# Altium PCB MX1508.PcbDoc
Units mil, origin at the board's own origin, x right, y up, seen from the top; angles counter-clockwise.
Board outline 1180 x 770 mil, 2 copper layers (Top Layer, Bottom Layer); 23 components, 20 nets, 84 pads, 21 vias.
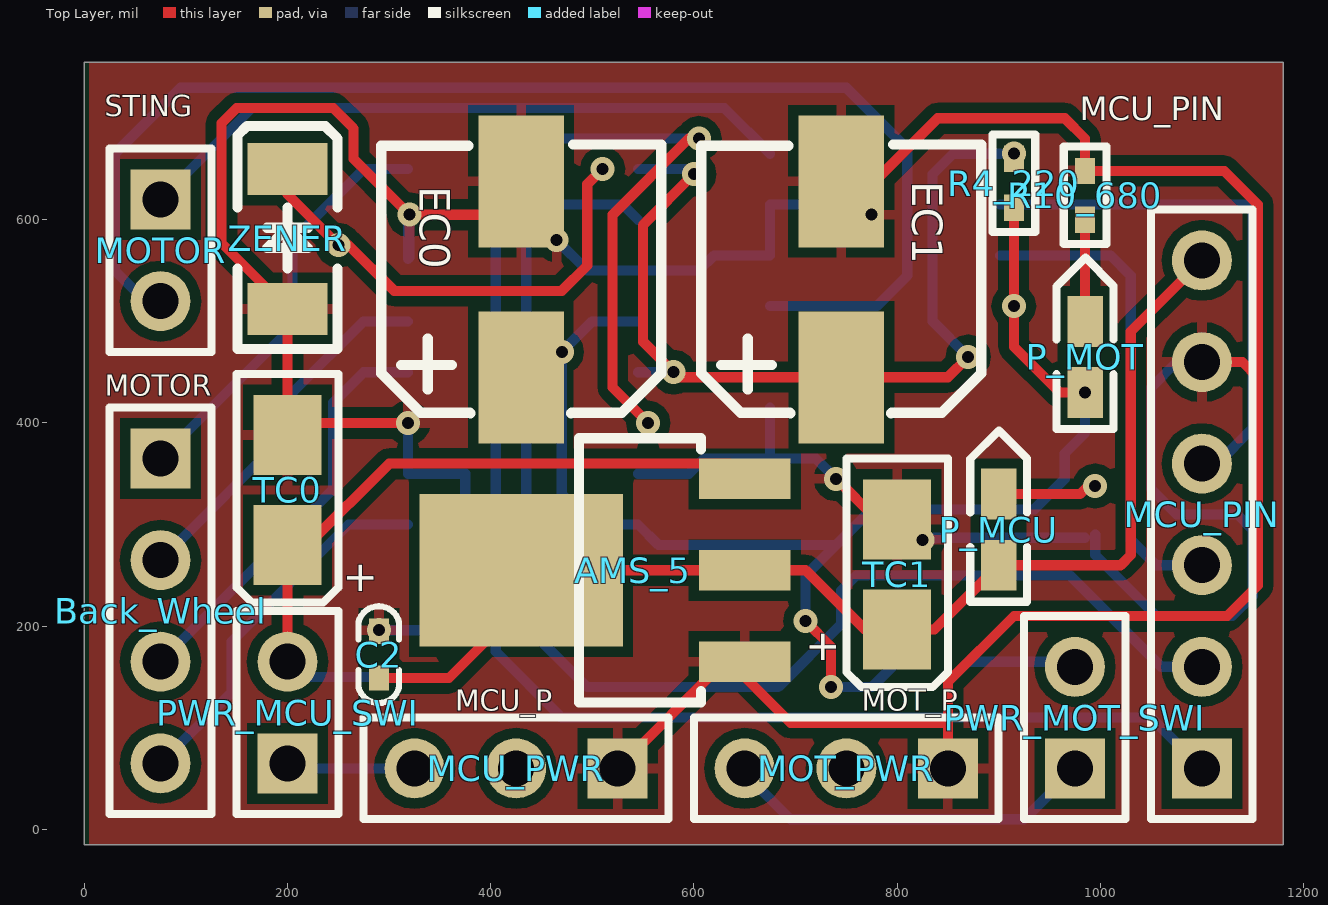
[diagram p0: Top Layer view]
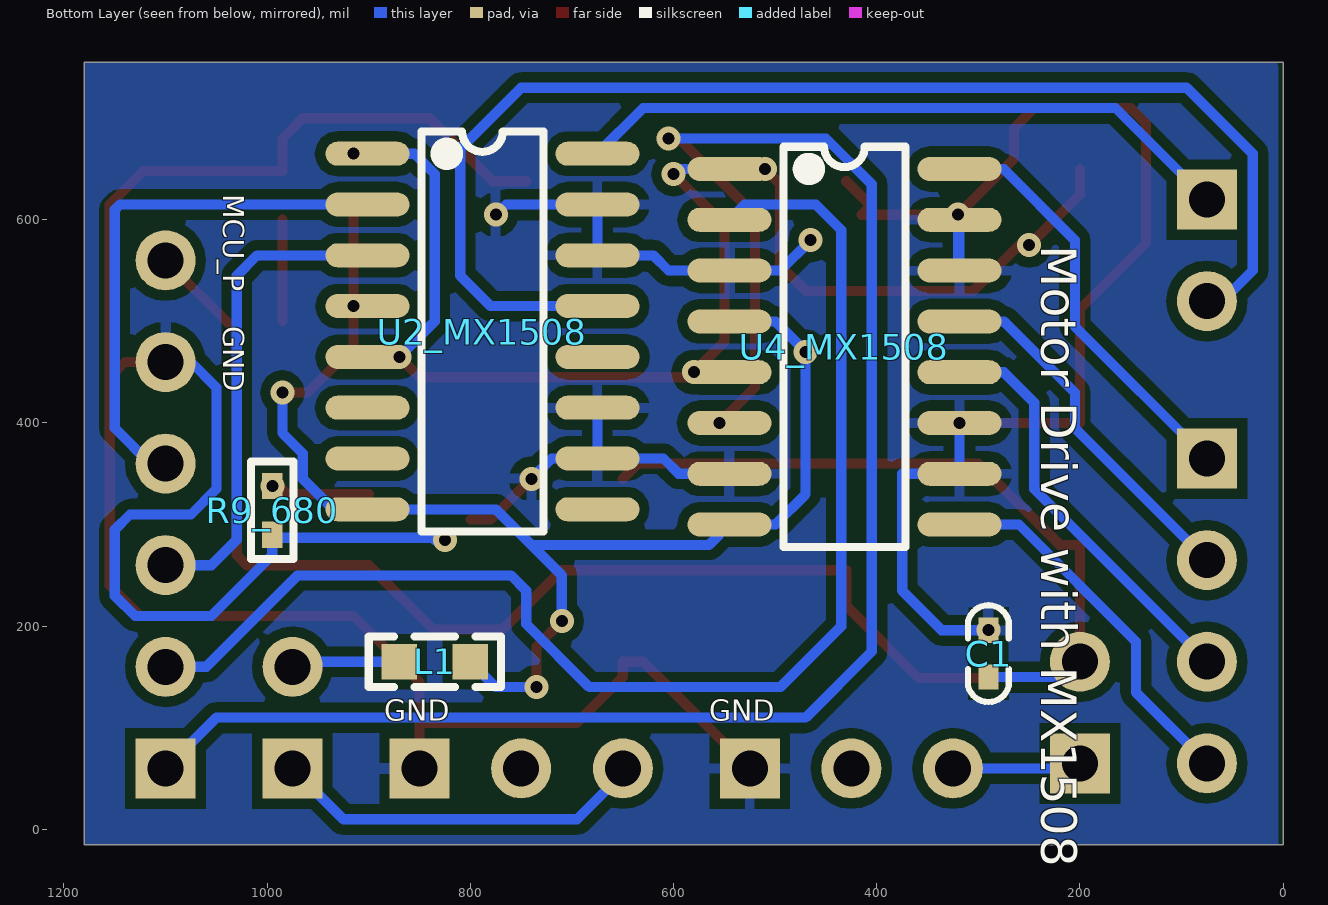
[diagram p1: Bottom Layer view, seen from below]
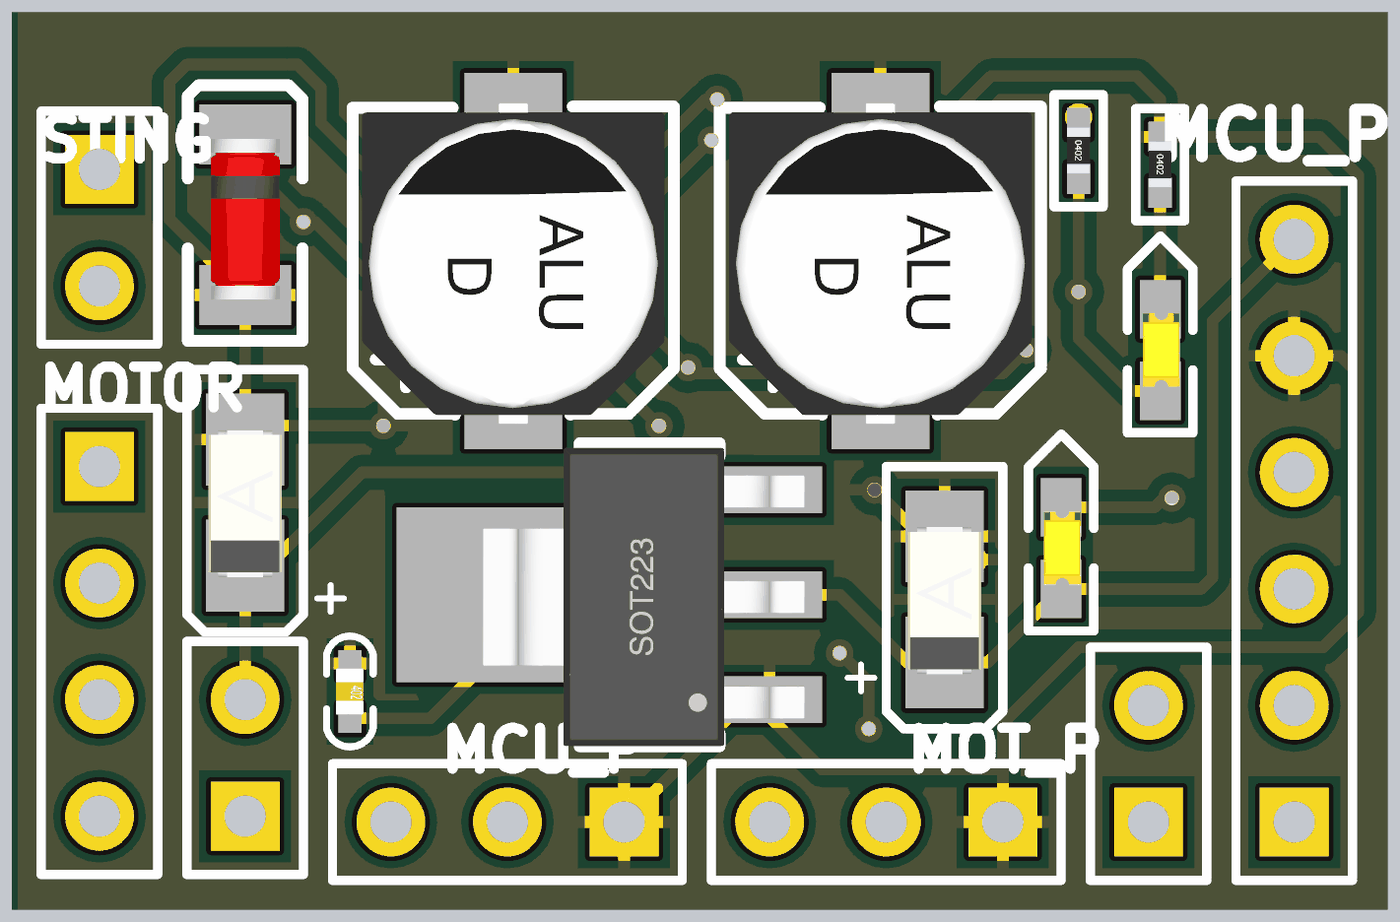
[diagram p2: 3D render of the assembled board from above, using the file's embedded part models]
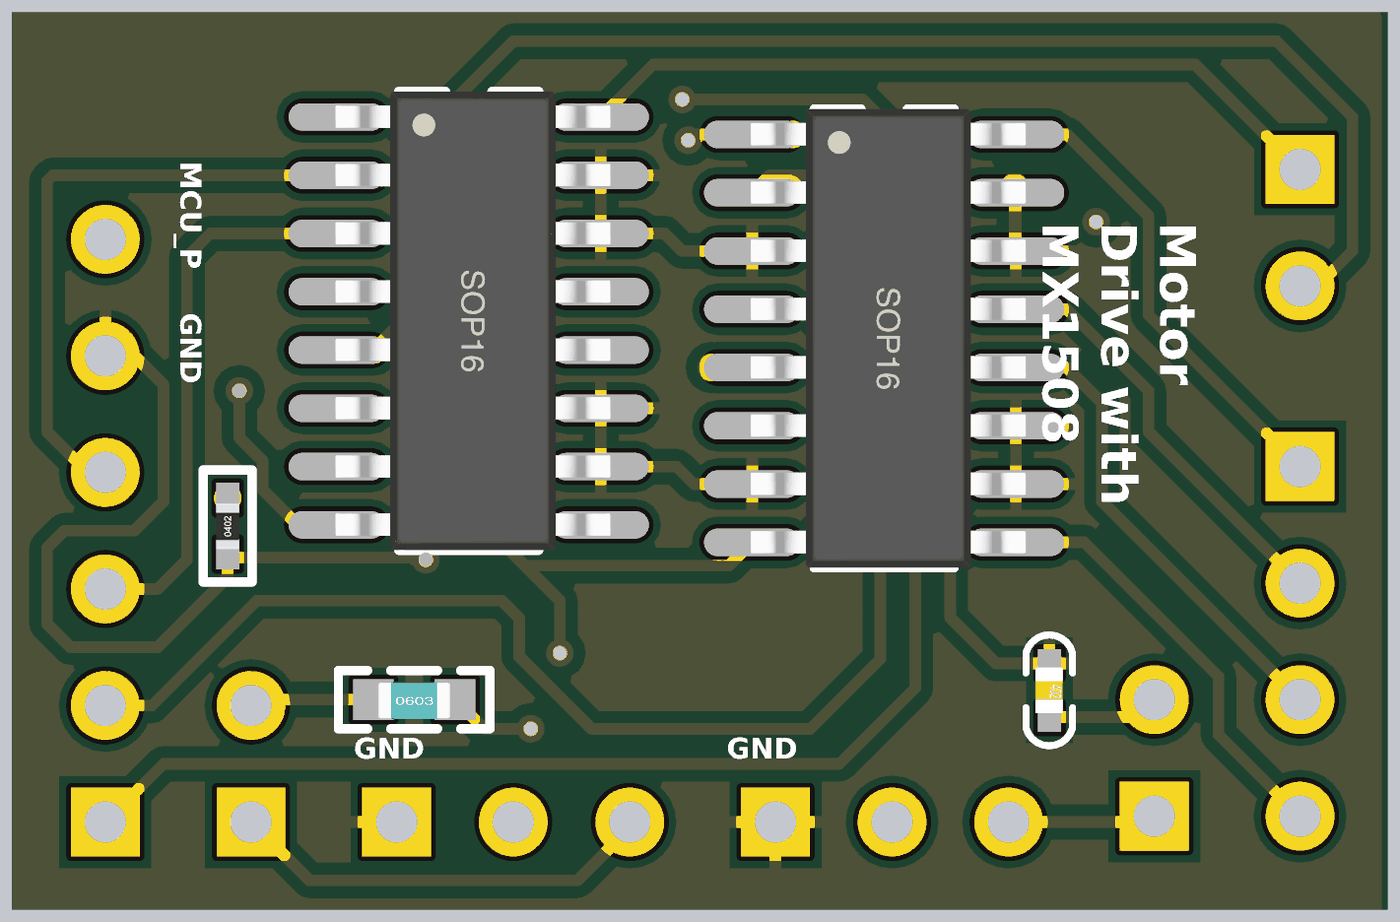
[diagram p3: 3D render of the assembled board from below, using the file's embedded part models]

## Layer stack, top to bottom
Top Solder: solder mask 0.4, Solder Resist, Dk 3.5
Top Layer: signal copper 1.4
Dielectric 1: dielectric 12.6, FR-4, Dk 4.8
Bottom Layer: signal copper 1.4
Bottom Solder: solder mask 0.4, Solder Resist, Dk 3.5

## Board outline
0,-15 0,755 1180,755 1180,-15

## Design rules (kind name [scope] priority, off if disabled: settings)
Clearance [All] p1: gap=10 ignorepadtopadclearanceinfootprint=FALSE except(0: Arc-Hole Track-Hole SMDPad-Hole THPad-Hole Via-Hole Fill-Hole Poly-Hole Region-Hole Text-Hole)
PolygonConnect [All] p1: connectstyle=Relief reliefconductorwidth=10 reliefentries=4 polygonreliefangle="90 Angle" airgapwidth=10
RoomDefinition MiniRacer_V2 [InComponentClass('MiniRacer_V2')] p1: confinementstyle=ConfineIn formatcopy=TRUE lockcomponents=FALSE outline 5,-15 1180,-15 1180,755 5,755
RoutingVias [All] p1: holewidth=11.81 width=23.62 viastyle="Through Hole" minholewidth=11.81 minwidth=23.62 maxholewidth=11.81 maxwidth=23.62
SolderMaskExpansion [All] p1: expansion=4
Width [All] p1: maxlimit=10 minlimit=10 preferedwidth=10
30 further rules are at their usual default settings.

## Components (designator, comment, footprint, x,y, rotation, side; value= is the part's Value field where it differs from the comment)
AMS_5 "AMS1117_5V" SOT223 650,255 r90 top
Back_Wheel "Header 4" HDR1X4 75,365 r270 top
C1 "104" 0402C 290.16,198 r270 bottom
C2 "104" 0402C 289.84,197 r270 top
EC0 "SMD_ECAP" SMD-EC6.3X6.3X10 430.02,444.18 r90 top
EC1 "SMD_ECAP" SMD-EC6.3X6.3X10 745,444.18 r90 top
L1 "100mH" 0603L 870,165 r180 bottom
MCU_PIN "Header 6" HDR1X6 1100,60 r90 top
MCU_PWR "Header 3" HDR1X3 525,60 r180 top
MOT_PWR "Header 3" HDR1X3 850,60 r180 top
MOTOR "Header 2" HDR1X2 75,620 r270 top
P_MCU "LED" LED-0603Y 900,260 r90 top
P_MOT "LED" LED-0603Y 985,430 r90 top
PWR_MCU_SWI "Header 2" HDR1X2 200,65 r90 top
PWR_MOT_SWI "Header 2" HDR1X2 975,60 r90 top
R4_220 "220" 0402R 915,660 r270 top
R9_680 "680" 0402R 995,290 r90 bottom
R10_680 "680" 0402R 985,648 r270 top
TC0 "106" TAJ-A/3216 200,278.15 r90 top
TC1 "106" TAJ-A/3216 800,195 r90 top
U2_MX1508 "MX1508" SOP16 901.38,665 r180 bottom
U4_MX1508 "MX1508" SOP16 545,650 r180 bottom
ZENER "5.6V_Zener" LL34 200,512.21 r90 top

## Footprints (in the part's own frame and the unit in brackets; to place one, negate y for a bottom-side part, rotate by r counter-clockwise, add the part's x,y. Pads: shape width x height; smd on the part's side, far side on the other; paste and mask are expansions set on the pad)
0402C [mil]
  rect 25x20 smd: 1(2,0.16) 2(48,0.16)
  silkscreen extent -23,-20 73,20, body extent 5,-12 45,12, height 8
0402R [mil]
  rect 26x20 smd: 1(0,0) 2(48,0)
  silkscreen extent -24,-21 72,21, body extent 4,-10 43,10, height 13
0603L [mil] "小功率贴片电感"
  rect 35x35 smd: 1(0,0) 2(70,0)
  silkscreen extent -30,-25 100,25, body extent 4,-17 66,15, height 31
HDR1X2 [mm] "Connector; Header; 2 Position"
  rect 1.5x1.5 hole 0.9: 1(0,0)
  round 1.5 hole 0.9: 2(2.54,0)
  silkscreen extent -1.27,-1.27 3.81,1.27
HDR1X3 [mm] "Connector; Header; 3 Position"
  rect 1.5x1.5 hole 0.9: 1(0,0)
  round 1.5 hole 0.9: 2(2.54,0) 3(5.08,0)
  silkscreen extent -1.27,-1.27 6.35,1.27
HDR1X4 [mm] "Connector; Header; 4 Position"
  rect 1.5x1.5 hole 0.9: 1(0,0)
  round 1.5 hole 0.9: 2(2.54,0) 3(5.08,0) 4(7.62,0)
  silkscreen extent -1.27,-1.27 8.89,1.27
HDR1X6 [mm] "Connector; Header; 6 Position"
  rect 1.5x1.5 hole 0.9: 1(0,0)
  round 1.5 hole 0.9: 2(2.54,0) 3(5.08,0) 4(7.62,0) 5(10.16,0) 6(12.7,0)
  silkscreen extent -1.27,-1.27 13.97,1.27
LED-0603Y [mil]
  rect 50x35 smd: A(0,0) K(70,0)
  silkscreen extent -36,-28 133,28, body extent 4,-17 66,15, height 24
LL34 [mm] "玻封二极管"
  rect 1.3x2 smd: A(0,0) K(3.5,0)
  silkscreen extent -1,-1.25 4.57,1.25, body extent -0.1,-0.75 3.4,0.75, height 1.5
SMD-EC6.3X6.3X10 [mm]
  rect 3.3x2.132 smd: 1(0.021,0) 2(4.921,0)
  silkscreen extent -0.88,-3.5 5.84,3.5, body extent -1.09,-3.3 5.91,3.3, height 5.4
SOP16 [mm]
  oval 2.1x0.6 smd: 1(0,0) 2(0,-1.27) 3(0,-2.54) 4(0,-3.81) 5(0,-5.08) 6(0,-6.35) 7(0,-7.62) 8(0,-8.89) 9(5.75,-8.89) 10(5.75,-7.62) 11(5.75,-6.35) 12(5.75,-5.08) 13(5.75,-3.81) 14(5.75,-2.54) 15(5.75,-1.27) 16(5.75,0)
  silkscreen extent 1.35,-9.44 4.4,0.56, body extent -0.04,-9.45 5.97,0.55, height 1.9
SOT223 [mil]
  rect 40x90 smd: 1(-90,0) 2(0,0) 3(90,0)
  rect 150x200 smd: 2(0,220)
  silkscreen extent -130,43 130,163, body extent -130,-30 126,246, height 65
TAJ-A/3216 [mm]
  rect 2x1.7 smd: 1(0.047,0) 2(2.794,0)
  silkscreen extent -1.4,-1.27 4.32,1.27, body extent -0.2,-0.8 3,0.8, height 1.6

## Part data
AMS_5: library part AMS1117, "三端稳压芯片"
Back_Wheel: "Header, 4-Pin", LatestRevisionDate=17-Jul-2002, LatestRevisionNote="Re-released for DXP Platform.", Publisher="Altium Limited"
C1 C2: library part CAP, "无极性电容"
EC0 EC1: "贴片电解电容"
L1: library part INDUCTOR, "INDUCTOR"
MCU_PIN: "Header, 6-Pin", LatestRevisionDate=17-Jul-2002, LatestRevisionNote="Re-released for DXP Platform.", Publisher="Altium Limited"
MCU_PWR MOT_PWR: "Header, 3-Pin", LatestRevisionDate=17-Jul-2002, LatestRevisionNote="Re-released for DXP Platform.", Publisher="Altium Limited"
MOTOR PWR_MCU_SWI PWR_MOT_SWI: "Header, 2-Pin", LatestRevisionDate=17-Jul-2002, LatestRevisionNote="Re-released for DXP Platform.", Publisher="Altium Limited"
R4_220 R9_680 R10_680: library part RES
TC0 TC1: library part TCAP, "钽电容"
ZENER: library part DIODE, "普通二极管"

## Via types
v1: diameter 23.62, hole 11.81, Top Layer to Bottom Layer, tented both sides, 21 vias

## Nets (pads, with @x,y where several pads share a name; then routed paths per layer and width w, separated by ;. In a path a pad name is that pad's centre, name@x,y a point inside that pad or via, vN(x,y) a via of type N, cw(c..) or ccw(c..) an arc to the next point about the centre after c; other vN are vias at no path point)
+5: AMS_5.2 C2.2 MCU_PIN.6 P_MCU.A TC1.1 | length 1177.8
  Top Layer w10: C2.2 359,149 430,220 430,255 650,255 710,255 768.15,196.85 TC1.1 836.85,196.85 P_MCU.A 1020,260 1030,270 1030,490 MCU_PIN.6
+5~6V: EC1.1 R4_220.1 U2_MX1508.1 U2_MX1508.5 U4_MX1508.1 U4_MX1508.5 ZENER.K | length 1360.6
  Top Layer w10: ZENER.K 200,625 v1(250,575) 260,575 305,530 470,530 495,555 495,635 v1(510,650) ; v1(600,645) 550,595 550,480 v1(580,450) 585,445 EC1.1 850,445 v1(870,465)
  Bottom Layer w10: U4_MX1508.5 v1(580,450) ; U4_MX1508.1 595,650 v1(600,645) ; v1(870,465) 835,500 835,645 855,665 U2_MX1508.1
  other v1: 915,665
+9V: EC0.1 L1.2 P_MOT.A R4_220.2 U2_MX1508.4 U2_MX1508.8 U4_MX1508.4 U4_MX1508.8 | length 1327.1
  Top Layer w10: v1(710,205) 735,180 v1(735,140) ; R4_220.2 v1(915,515) 915,475 960,430 v1(985,430)
  Bottom Layer w10: U4_MX1508.4 500,500 v1(470,470) 470,330 500,300 U4_MX1508.8 565,280 740,280 ; v1(710,205) 710,250 740,280 ; v1(735,140) 775,140 L1.2 ; v1(985,430) 985,390 965,370 965,345 935,315 U2_MX1508.8 775,315 740,280
GND: AMS_5.1 C1.1 C2.1 EC0.2 EC1.2 MCU_PIN.5 MCU_PWR.1 MOT_PWR.1 R9_680.1 R10_680.1 TC0.2 TC1.2 U2_MX1508.10 U2_MX1508.11 U2_MX1508.14 U2_MX1508.15 U4_MX1508.3 U4_MX1508.7 U4_MX1508.10 U4_MX1508.11 U4_MX1508.14 U4_MX1508.15 ZENER.A | length 4438.8
  Top Layer w10: v1(318.62,400) 211.85,400 205.93,394.07 200,400 ZENER.A 135,577.21 135,695 150,710 245,710 265,690 265,660 v1(320,605) 415,605 406.04,613.96 EC0.2 ; MCU_PWR.1 630,165 AMS_5.1 650,150 695,105 850,105 ; v1(740,345) 780,305 TC1.2 ; EC1.2 777.91,637.91 840,700 965,700 985,680 R10_680.1 1122,648 1155,615 1155,445 ; MOT_PWR.1 850,105 ; MCU_PIN.5 1140,460 1155,445 ; 850,105 850,145 915,210 1125,210 1155,240 1155,445
  Bottom Layer w10: v1(290,196) 336,196 375,235 375,350 U4_MX1508.10 v1(318.62,400) U4_MX1508.11@313.62,395 ; U4_MX1508.15 318.62,561.38 320,562.76 v1(320,605) ; v1(465,580) 495,550 U4_MX1508.3 605,550 620,565 U2_MX1508.14 U2_MX1508.15 765,615 v1(775,605) ; U4_MX1508.7 595,350 610,365 U2_MX1508.10 ; U2_MX1508.11 U2_MX1508.10 ; v1(740,345) 720,365 U2_MX1508.10 ; v1(825,285) 835,285 837,287 R9_680.1@985,287 ; R9_680.1 995,270 1055,210 1130,210 1150,230 1150,295 1135,310 1075,310 1050,335 1050,435 1075,460 MCU_PIN.5
NetAMS_5_3: AMS_5.3 C1.2 PWR_MCU_SWI.2 TC0.1 | length 700.6
  Top Layer w10: PWR_MCU_SWI.2 TC0.1 220,280 300,360 635,360 AMS_5.3
  Bottom Layer w10: PWR_MCU_SWI.2 215,150 C1.2
NetL1_1: L1.1 PWR_MOT_SWI.2 | length 107.1
  Bottom Layer w10: L1.1 970,165 PWR_MOT_SWI.2
NetMCU_PIN_1: MCU_PIN.1 U4_MX1508.6 | length 1756.8
  Top Layer w10: v1(555,400) 520,435 520,605 595,680 v1(605,680)
  Bottom Layer w10: v1(605,680) 450,680 405,635 405,175 470,110 1050,110 MCU_PIN.1
NetMCU_PIN_2: MCU_PIN.2 U4_MX1508.2 | length 1308.5
  Bottom Layer w10: U4_MX1508.2 530,615 460,615 435,590 435,200 495,140 682.92,140 745,202.08 745,235 760,250 970,250 1060,160 MCU_PIN.2
NetMCU_PIN_3: MCU_PIN.3 U2_MX1508.3 | length 477.3
  Bottom Layer w10: U2_MX1508.3 1010,565 1030,545 1030,285 1055,260 MCU_PIN.3
NetMCU_PIN_4: MCU_PIN.4 U2_MX1508.2 | length 530.2
  Bottom Layer w10: U2_MX1508.2 1145,615 1150,610 1150,395 1115,360 MCU_PIN.4
NetMCU_PWR_3: MCU_PWR.3 PWR_MCU_SWI.1 | length 127.1
  Bottom Layer w10: PWR_MCU_SWI.1 205,60 MCU_PWR.3
NetMOT_PWR_3: MOT_PWR.3 PWR_MOT_SWI.1 | length 369.4
  Bottom Layer w10: MOT_PWR.3 650,55 695,10 925,10 PWR_MOT_SWI.1
NetP_MCU_K: P_MCU.K R9_680.2 | length 98.3
  Top Layer w10: P_MCU.K 980,330 988,338 v1(995,338)
NetP_MOT_K: P_MOT.K R10_680.2 | length 100
  Top Layer w10: P_MOT.K R10_680.2
OUTA0: MOTOR.1 U2_MX1508.16 | length 655.9
  Bottom Layer w10: MOTOR.1 165,710 630,710 U2_MX1508.16
OUTA1: Back_Wheel.1 U4_MX1508.16 | length 411.5
  Bottom Layer w10: Back_Wheel.1 205,495 205,580 275,650 U4_MX1508.16
OUTA2: Back_Wheel.3 U4_MX1508.12 | length 411.5
  Bottom Layer w10: Back_Wheel.3 245,335 245,420 275,450 U4_MX1508.12
OUTB0: MOTOR.2 U2_MX1508.13 | length 1276.6
  Bottom Layer w10: MOTOR.2 60,520 30,550 30,665 95,730 750,730 810,670 810,545 780,515 U2_MX1508.13
OUTB1: Back_Wheel.2 U4_MX1508.13 | length 361.5
  Bottom Layer w10: Back_Wheel.2 205,395 205,430 275,500 U4_MX1508.13
OUTB2: Back_Wheel.4 U4_MX1508.9 | length 370.3
  Bottom Layer w10: Back_Wheel.4 145,135 145,185 260,300 U4_MX1508.9
pads on no net: MCU_PWR.2 MOT_PWR.2 U2_MX1508.6 U2_MX1508.7 U2_MX1508.9 U2_MX1508.12

## Polygon pours and split planes (outlines as drawn)
GND on Top Layer "Top Layer-GND" (solid, pour order 0): 5,755 1180,755 1180,-15 5,-15
GND on Bottom Layer "Bottom Layer-GND" (solid, pour order 4): 0,755 1180,755 1180,-15 5,-15 5,750

## Silkscreen, mask and mechanical layers (free items; w line width, h text height)
Top Overlay:
  text "STING" at 20,695 h35
  text "MCU_PIN" at 980,690 h40
  text "MOTOR" at 20,420 h35
  text "MCU_P" at 365,110 h35
  text "MOT_P" at 765,110 h35
Bottom Overlay:
  text "MCU_P" at 1050,625 h35 r90
  text "Motor Drive with MX1508" at 250,575 h60 r90
  text "GND" at 1050,495 h35 r90
  text "GND" at 565,100 h35
  text "GND" at 885,100 h35
Mechanical 13:
  the board outline again, w10
Mechanical 15:
  lines w0.1: 261,715.9 263,717.9

## Text inside footprints (layer, text, board x,y; h text height)
TC0: Top Overlay "+" at 285,230 h30 r90
TC1: Top Overlay "+" at 740,161.85 h30 r90